# EAGLE board Problema-06 (EAGLE 9.7.0)

Size 101.97 x 112.04 mm. Coordinates in mm from the lower left corner, seen from the top.
Outline: 0,0 101.97,0 101.97,112.04 0,112.04 0,0
Copper layers (1*16): Top 0.035mm / dielectric 1.5mm / Bottom 0.035mm
Design rules "default": minimum track width 6mil, minimum drill 0.35mm, track to track 6mil, track to pad 6mil, pad to pad 6mil, via to via 6mil, smd to smd 6mil, copper to edge 40mil, drill to drill 6mil, minimum pad ring 10mil, minimum via ring 8mil, stop-mask expansion 4mil, vias tented up to drill 0mil, thermal gap 10mil

## Footprints (pad centres in the part's own frame; a part is rotated, then mirrored left to right if it is on the bottom)
1X08 = drill 1.016 long: 1 -8.89,0; 2 -6.35,0; 3 -3.81,0; 4 -1.27,0; 5 1.27,0; 6 3.81,0; 7 6.35,0; 8 8.89,0
HA-06-SM065 = drill 1 pad 1.676: 1 -2.54,-2.54; 2 0,2.54; 3 2.54,-2.54
ARDUINO-UNO-R3-SHIELD = drill 1.016 pad 1.88: 3.3V 24.13,-2.54; 5V 24.13,0; A0 24.13,12.7; A1 24.13,15.24; A2 24.13,17.78; A3 24.13,20.32; A4 24.13,22.86; A5 24.13,25.4; AREF -24.13,-13.97; D2 -24.13,20.32; D3 -24.13,17.78; D4 -24.13,15.24; D5 -24.13,12.7; D6 -24.13,10.16; D7 -24.13,7.62; D8 -24.13,3.81; D9 -24.13,1.27; D10 -24.13,-1.27; D11 -24.13,-3.81; D12 -24.13,-6.35; D13 -24.13,-8.89; GND@0 24.13,2.54; GND@1 24.13,5.08; GND@2 -24.13,-11.43; IOREF 24.13,-7.62; NC 24.13,-10.16; RES 24.13,-5.08; RX -24.13,25.4; SCL -24.13,-19.05; SDA -24.13,-16.51; TX -24.13,22.86; VIN 24.13,7.62
JHD-162A = drill 1.016 long: 1 -19.05,0; 2 -16.51,0; 3 -13.97,0; 4 -11.43,0; 5 -8.89,0; 6 -6.35,0; 7 -3.81,0; 8 -1.27,0; 9 1.27,0; 10 3.81,0; 11 6.35,0; 12 8.89,0; 13 11.43,0; 14 13.97,0; 15 16.51,0; 16 19.05,0

## Placement (x,y rotation side)
KEYPADENTRADA  KEYPAD-4X4  [1X08]  73.7,105.76 0 top
RPOT3  250k  [HA-06-SM065]  7.05,39.51 90 top
U1  ARDUINO-UNO-R3-SHIELD  [ARDUINO-UNO-R3-SHIELD]  65.26,71.01 270 top
USAIDA  LCD-16X2JHD-162A  [JHD-162A]  46.35,36.63 0 top

## Library data of the parts
KEYPADENTRADA RPOT3 U1 USAIDA = Tinkercad

## Nets
U1_5V: RPOT3.1 U1.5V USAIDA.2
U1_A1: U1.A1 USAIDA.14
U1_A2: U1.A2 USAIDA.13
U1_A3: U1.A3 USAIDA.12
U1_A4: U1.A4 USAIDA.11
U1_D2: KEYPADENTRADA.5 U1.D2
U1_D3: KEYPADENTRADA.6 U1.D3
U1_D4: KEYPADENTRADA.7 U1.D4
U1_D5: KEYPADENTRADA.8 U1.D5
U1_D6: KEYPADENTRADA.1 U1.D6
U1_D7: KEYPADENTRADA.2 U1.D7
U1_D8: KEYPADENTRADA.3 U1.D8
U1_D9: KEYPADENTRADA.4 U1.D9
U1_D11: U1.D11 USAIDA.6
U1_D12: U1.D12 USAIDA.4
U1_GND: RPOT3.3 U1.GND@0 U1.GND@1 U1.GND@2 USAIDA.1 USAIDA.5
USAIDA_VO: RPOT3.2 USAIDA.3

## Tracks (layer width: path | path; a pad name or v marks a point on that pad's centre or on a via)
U1_5V  (2 unrouted)
U1_A1  (1 unrouted)
U1_A2  (1 unrouted)
U1_A3  (1 unrouted)
U1_A4  (1 unrouted)
U1_D2  (1 unrouted)
U1_D3  (1 unrouted)
U1_D4  (1 unrouted)
U1_D5  (1 unrouted)
U1_D6  (1 unrouted)
U1_D7  (1 unrouted)
U1_D8  (1 unrouted)
U1_D9  (1 unrouted)
U1_D11  (1 unrouted)
U1_D12  (1 unrouted)
U1_GND  (5 unrouted)
USAIDA_VO  (1 unrouted)